# EAGLE board midi_nubbin_panel (EAGLE 6.6.0)
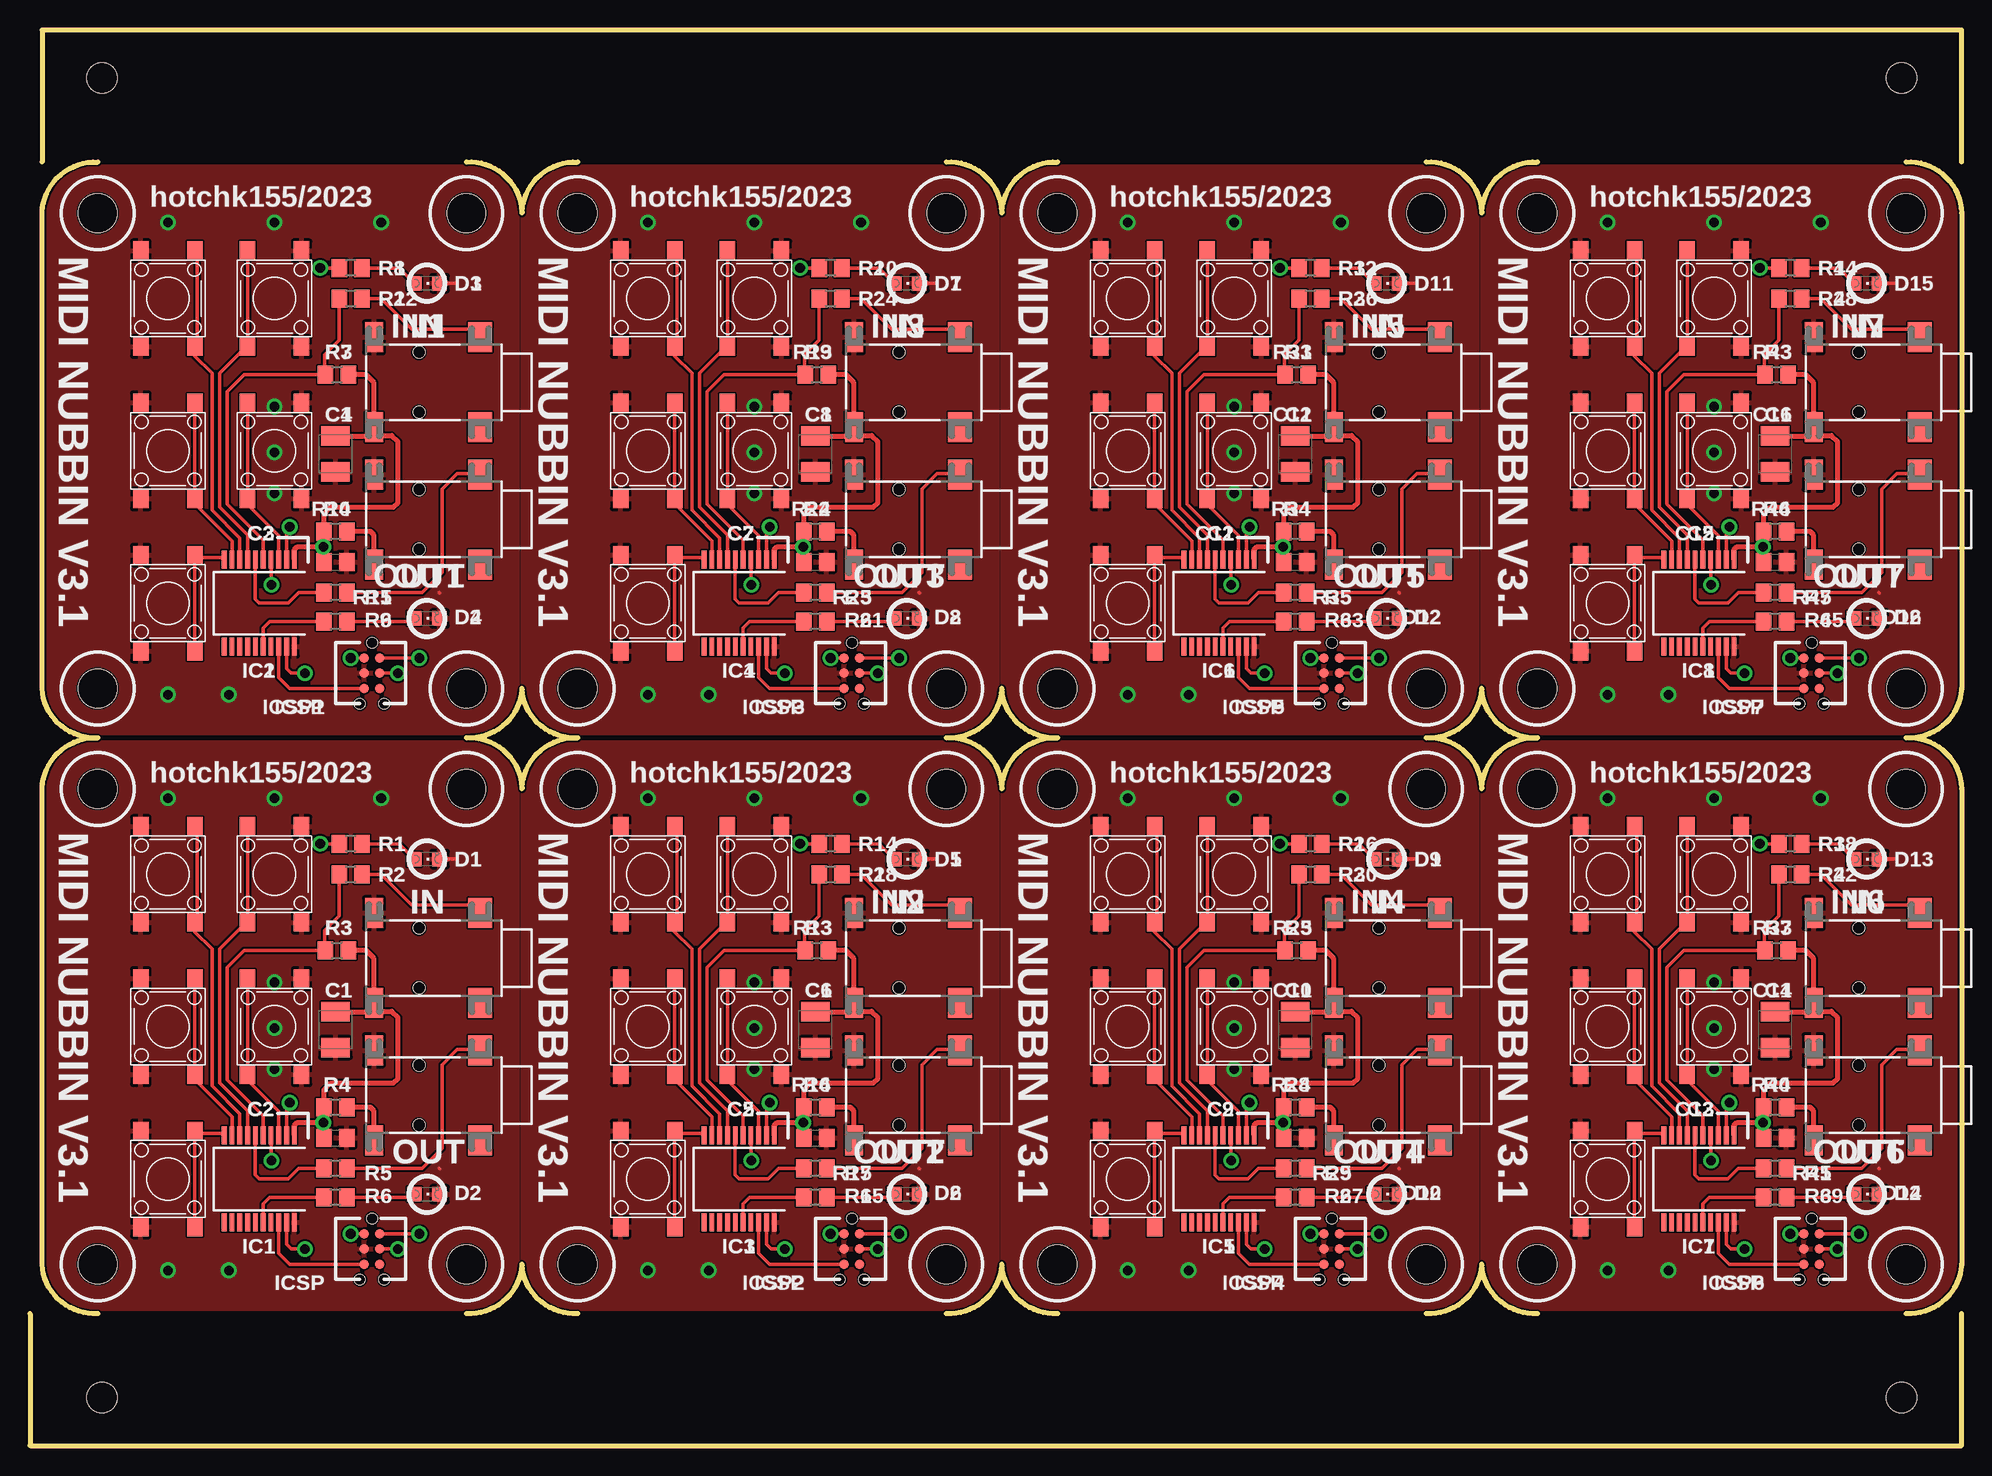
[diagram p0: board, top side]
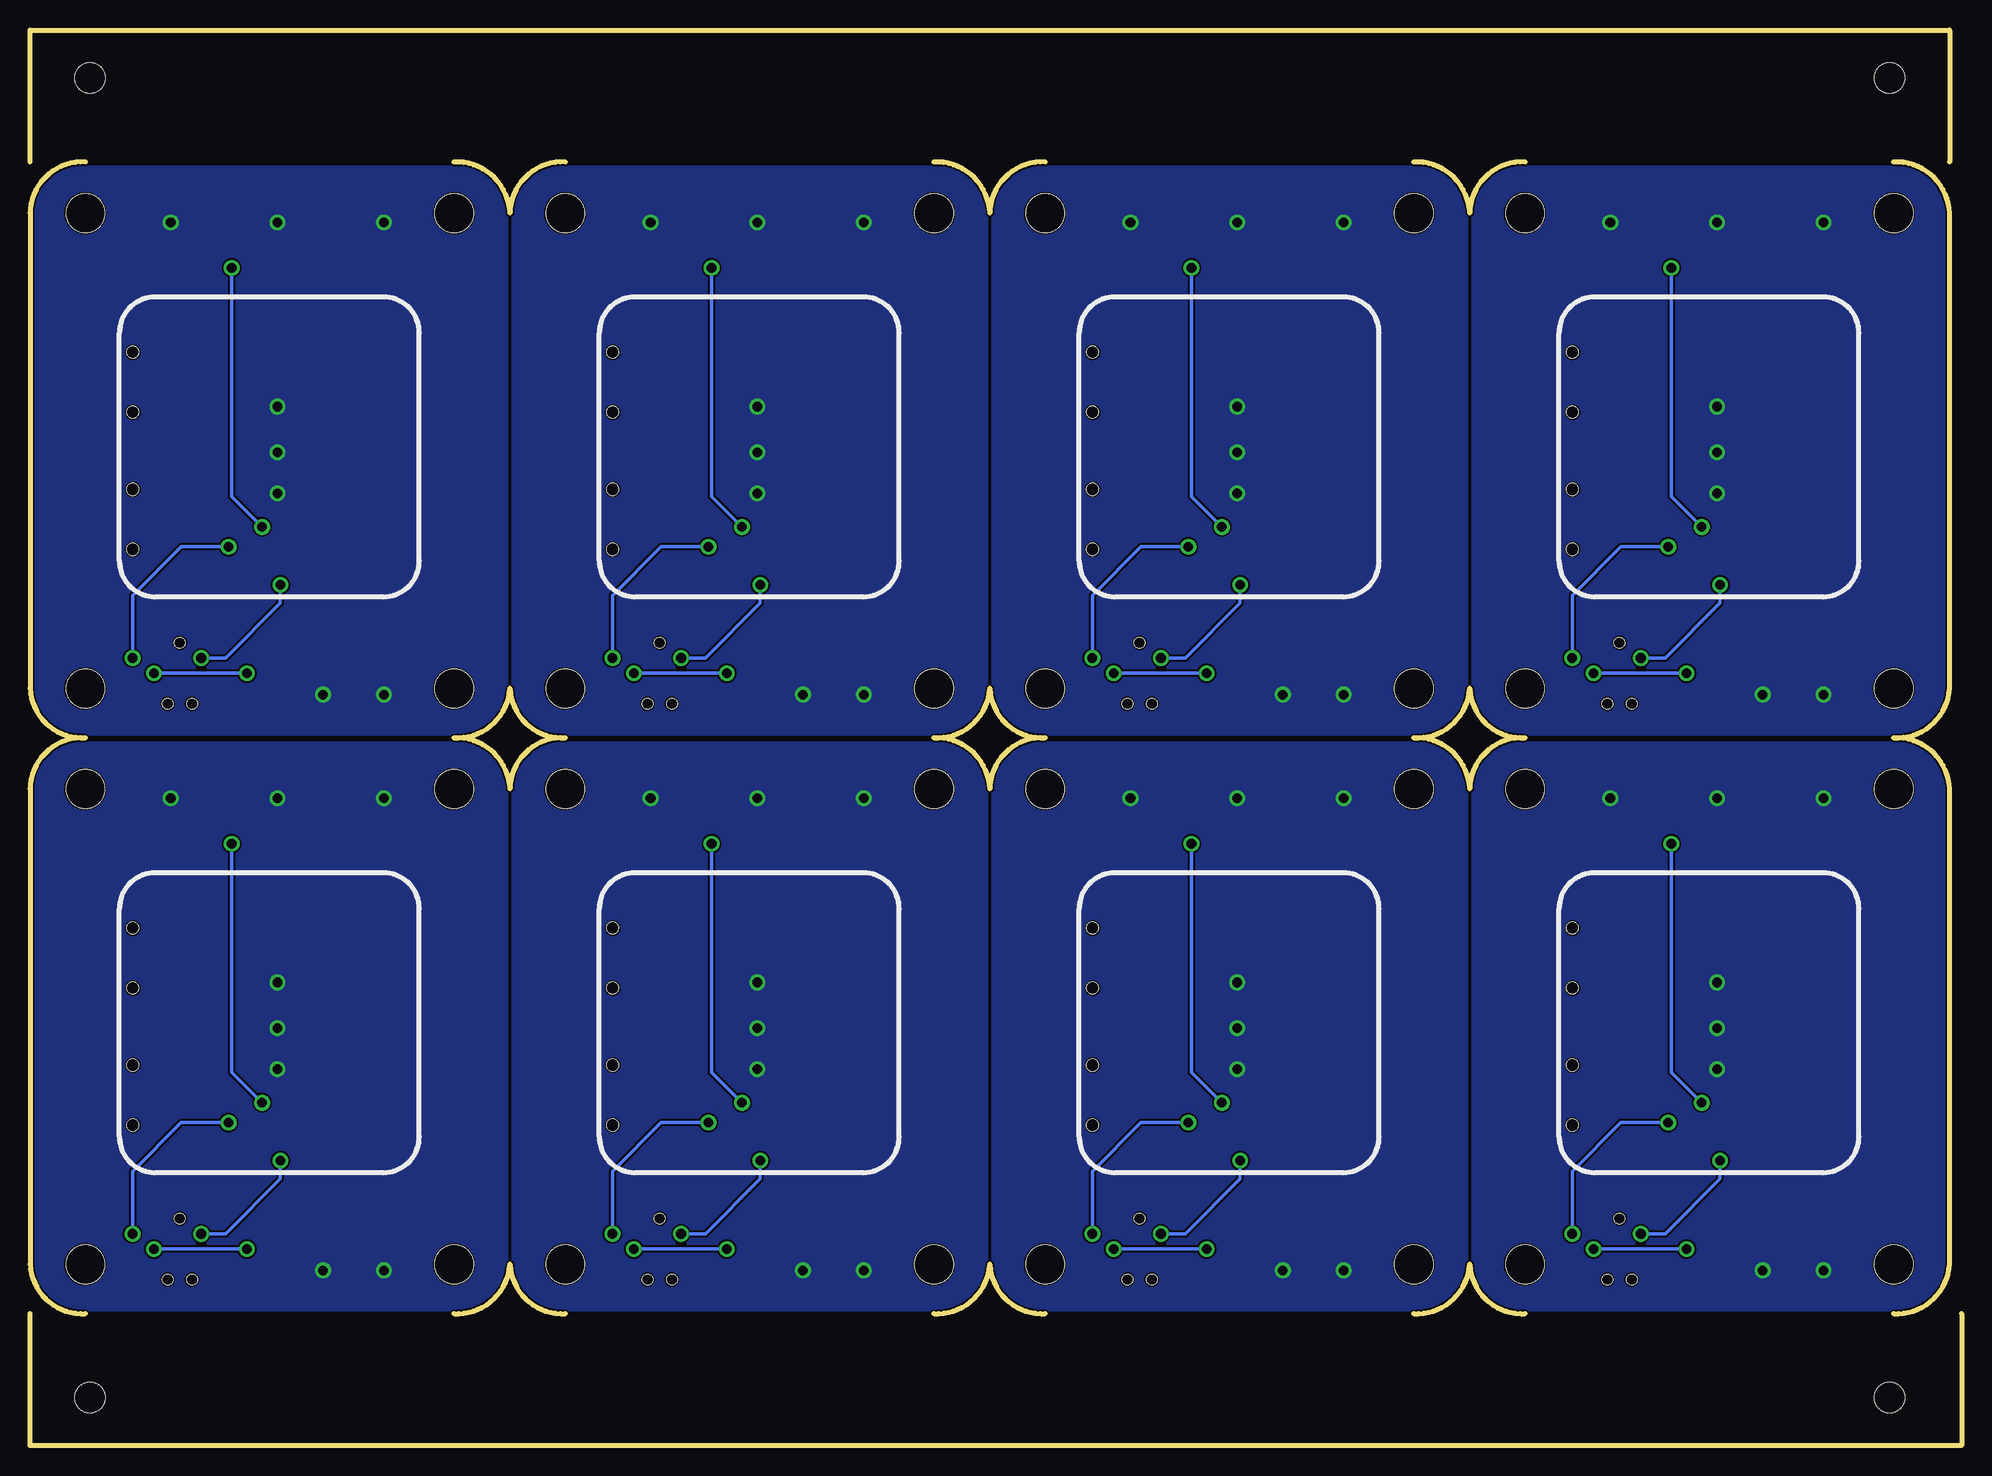
[diagram p1: board, bottom side, seen from below]

Size 161 x 118 mm. Coordinates in mm from the lower left corner, seen from the top.
Outline: 36.38,11 arc90 41,15.11 arc90 45.65,11
Outline: 5.65,11 arc-90 1,15.11 1,54.73 arc-90 5.65,59 arc-90 1,63.11 1,102.73 arc-90 5.65,107
Outline: 36.38,107 arc-92 41,102.73 arc-90 45.65,107
Outline: 76.38,11 arc90 81,15.11 arc90 85.65,11
Outline: 76.38,107 arc-92 81,102.73 arc-90 85.65,107
Outline: 116.38,11 arc90 121,15.11 arc90 125.65,11
Outline: 116.38,107 arc-92 121,102.73 arc-90 125.65,107
Outline: 156.38,11 arc90 161,15.11 161,54.73 arc92 156.38,59 arc90 161,63.11 161,102.73 arc92 156.38,107
Outline: 161,107 161,118 1,118 1,107
Outline: 0,11 0,0 161,0 161,11
Outline: 36.38,59 arc-92 41,54.73 arc-90 45.65,59 arc-90 41,63.11 arc-90 36.38,59
Outline: 76.38,59 arc-92 81,54.73 arc-90 85.65,59 arc-90 81,63.11 arc-90 76.38,59
Outline: 116.38,59 arc-92 121,54.73 arc-90 125.65,59 arc-90 121,63.11 arc-90 116.38,59
Copper layers (1*16): Top 0.035mm / dielectric 1.5mm / Bottom 0.035mm
Design rules "hackvana *": minimum track width 6mil, minimum drill 0.3mm, track to track 6mil, track to pad 9mil, pad to pad 6mil, via to via 6mil, smd to smd 0mil, copper to edge 6mil, drill to drill 6mil, minimum pad ring 10mil, minimum via ring 10mil, stop-mask expansion 2mil, vias tented up to drill 100mil, thermal gap 10mil
Holes 3.2 mm at 5.65,54.73 5.65,15.11 36.38,54.73 36.38,15.11 5.65,102.73 5.65,63.11 36.38,102.73 36.38,63.11 45.65,54.73 45.65,15.11 76.38,54.73 76.38,15.11 45.65,102.73 45.65,63.11 76.38,102.73 76.38,63.11 85.65,54.73 85.65,15.11 116.38,54.73 116.38,15.11 85.65,102.73 85.65,63.11 116.38,102.73 116.38,63.11 125.65,54.73 125.65,15.11 156.38,54.73 156.38,15.11 125.65,102.73 125.65,63.11 156.38,102.73 156.38,63.11
Holes 2.54 mm at 6,114 6,4 156,114 156,4

## Footprints (pad centres in the part's own frame; a part is rotated, then mirrored left to right if it is on the bottom)
SMC_B = smd 1.6 x 2.4: + -1.5,0; - 1.5,0
C0805 = smd 1.3 x 1.5: 1 -0.95,0; 2 0.95,0
CHIPLED_0805 = smd 1.2 x 1.2: A 0,-1.05; C 0,1.05
SSOP20 = smd 0.4 x 1.5: 1 -2.925,-3.625; 2 -2.275,-3.625; 3 -1.625,-3.625; 4 -0.975,-3.625; 5 -0.325,-3.625; 6 0.325,-3.625; 7 0.975,-3.625; 8 1.625,-3.625; 9 2.275,-3.625; 10 2.925,-3.625; 11 2.925,3.625; 12 2.275,3.625; 13 1.625,3.625; 14 0.975,3.625; 15 0.325,3.625; 16 -0.325,3.625; 17 -0.975,3.625; 18 -1.625,3.625; 19 -2.275,3.625; 20 -2.925,3.625
TC2030-MCP-NL = smd 0.787 x 0.787: 1 1.27,-0.635; 2 1.27,0.635; 3 2.54,-0.635; 4 2.54,0.635; 5 3.81,-0.635; 6 3.81,0.635 | hole 0.889: 0,0; 5.08,-1.016; 5.08,1.016
1503_02 = smd 2.5 x 1.5: 1 -3.75,-10.75; 3 3.75,-10.75 | smd 2.5 x 2: 2 -3.75,-1.9; 2@2 3.75,-1.9 | hole 1: -2.5,-7; 2.5,-7
R0805 = smd 1.3 x 1.5: 1 -0.95,0; 2 0.95,0
6MMTACTSMT = smd 1.55 x 1.3: 1 -4,2.25; 2 -4,-2.25; 3 4,-2.25; 4 4,2.25

## Placement (x,y rotation side)
C1  [SMC_B]  25.46,34.67 270 top
C2  [C0805]  25.46,25.65 0 top
C3  [C0805]  25.46,73.65 0 top
C4  [SMC_B]  25.46,82.67 270 top
C5  [C0805]  65.46,25.65 0 top
C6  [SMC_B]  65.46,34.67 270 top
C7  [C0805]  65.46,73.65 0 top
C8  [SMC_B]  65.46,82.67 270 top
C9  [C0805]  105.46,25.65 0 top
C10  [SMC_B]  105.46,34.67 270 top
C11  [C0805]  105.46,73.65 0 top
C12  [SMC_B]  105.46,82.67 270 top
C13  [C0805]  145.46,25.65 0 top
C14  [SMC_B]  145.46,34.67 270 top
C15  [C0805]  145.46,73.65 0 top
C16  [SMC_B]  145.46,82.67 270 top
D1  [CHIPLED_0805]  33.08,48.89 270 top
D2  [CHIPLED_0805]  33.08,20.95 270 top
D3  [CHIPLED_0805]  33.08,96.89 270 top
D4  [CHIPLED_0805]  33.08,68.95 270 top
D5  [CHIPLED_0805]  73.08,48.89 270 top
D6  [CHIPLED_0805]  73.08,20.95 270 top
D7  [CHIPLED_0805]  73.08,96.89 270 top
D8  [CHIPLED_0805]  73.08,68.95 270 top
D9  [CHIPLED_0805]  113.08,48.89 270 top
D10  [CHIPLED_0805]  113.08,20.95 270 top
D11  [CHIPLED_0805]  113.08,96.89 270 top
D12  [CHIPLED_0805]  113.08,68.95 270 top
D13  [CHIPLED_0805]  153.08,48.89 270 top
D14  [CHIPLED_0805]  153.08,20.95 270 top
D15  [CHIPLED_0805]  153.08,96.89 270 top
D16  [CHIPLED_0805]  153.08,68.95 270 top
IC1  PIC16F15345SSOP20  [SSOP20]  19.11,22.22 180 top
IC2  PIC16F15345SSOP20  [SSOP20]  19.11,70.22 180 top
IC3  PIC16F15345SSOP20  [SSOP20]  59.11,22.22 180 top
IC4  PIC16F15345SSOP20  [SSOP20]  59.11,70.22 180 top
IC5  PIC16F15345SSOP20  [SSOP20]  99.11,22.22 180 top
IC6  PIC16F15345SSOP20  [SSOP20]  99.11,70.22 180 top
IC7  PIC16F15345SSOP20  [SSOP20]  139.11,22.22 180 top
IC8  PIC16F15345SSOP20  [SSOP20]  139.11,70.22 180 top
ICSP  [TC2030-MCP-NL]  28.51,18.92 270 top
ICSP1  [TC2030-MCP-NL]  28.51,66.92 270 top
ICSP2  [TC2030-MCP-NL]  68.51,18.92 270 top
ICSP3  [TC2030-MCP-NL]  68.51,66.92 270 top
ICSP4  [TC2030-MCP-NL]  108.51,18.92 270 top
ICSP5  [TC2030-MCP-NL]  108.51,66.92 270 top
ICSP6  [TC2030-MCP-NL]  148.51,18.92 270 top
ICSP7  [TC2030-MCP-NL]  148.51,66.92 270 top
IN  1503_02  [1503_02]  39.43,40.64 270 top
IN1  1503_02  [1503_02]  39.43,88.64 270 top
IN2  1503_02  [1503_02]  79.43,40.64 270 top
IN3  1503_02  [1503_02]  79.43,88.64 270 top
IN4  1503_02  [1503_02]  119.43,40.64 270 top
IN5  1503_02  [1503_02]  119.43,88.64 270 top
IN6  1503_02  [1503_02]  159.43,40.64 270 top
IN7  1503_02  [1503_02]  159.43,88.64 270 top
OUT  1503_02  [1503_02]  39.43,29.2 270 top
OUT1  1503_02  [1503_02]  39.43,77.2 270 top
OUT2  1503_02  [1503_02]  79.43,29.2 270 top
OUT3  1503_02  [1503_02]  79.43,77.2 270 top
OUT4  1503_02  [1503_02]  119.43,29.2 270 top
OUT5  1503_02  [1503_02]  119.43,77.2 270 top
OUT6  1503_02  [1503_02]  159.43,29.2 270 top
OUT7  1503_02  [1503_02]  159.43,77.2 270 top
R1  [R0805]  26.73,50.16 180 top
R2  220  [R0805]  26.73,47.62 0 top
R3  4k7  [R0805]  25.59,41.27 0 top
R4  [R0805]  25.46,28.19 180 top
R5  220  [R0805]  25.46,23.11 180 top
R6  [R0805]  25.46,20.7 180 top
R7  4k7  [R0805]  25.59,89.27 0 top
R8  [R0805]  26.73,98.16 180 top
R9  [R0805]  25.46,68.7 180 top
R10  [R0805]  25.46,76.19 180 top
R11  220  [R0805]  25.46,71.11 180 top
R12  220  [R0805]  26.73,95.62 0 top
R13  4k7  [R0805]  65.59,41.27 0 top
R14  [R0805]  66.73,50.16 180 top
R15  [R0805]  65.46,20.7 180 top
R16  [R0805]  65.46,28.19 180 top
R17  220  [R0805]  65.46,23.11 180 top
R18  220  [R0805]  66.73,47.62 0 top
R19  4k7  [R0805]  65.59,89.27 0 top
R20  [R0805]  66.73,98.16 180 top
R21  [R0805]  65.46,68.7 180 top
R22  [R0805]  65.46,76.19 180 top
R23  220  [R0805]  65.46,71.11 180 top
R24  220  [R0805]  66.73,95.62 0 top
R25  4k7  [R0805]  105.59,41.27 0 top
R26  [R0805]  106.73,50.16 180 top
R27  [R0805]  105.46,20.7 180 top
R28  [R0805]  105.46,28.19 180 top
R29  220  [R0805]  105.46,23.11 180 top
R30  220  [R0805]  106.73,47.62 0 top
R31  4k7  [R0805]  105.59,89.27 0 top
R32  [R0805]  106.73,98.16 180 top
R33  [R0805]  105.46,68.7 180 top
R34  [R0805]  105.46,76.19 180 top
R35  220  [R0805]  105.46,71.11 180 top
R36  220  [R0805]  106.73,95.62 0 top
R37  4k7  [R0805]  145.59,41.27 0 top
R38  [R0805]  146.73,50.16 180 top
R39  [R0805]  145.46,20.7 180 top
R40  [R0805]  145.46,28.19 180 top
R41  220  [R0805]  145.46,23.11 180 top
R42  220  [R0805]  146.73,47.62 0 top
R43  4k7  [R0805]  145.59,89.27 0 top
R44  [R0805]  146.73,98.16 180 top
R45  [R0805]  145.46,68.7 180 top
R46  [R0805]  145.46,76.19 180 top
R47  220  [R0805]  145.46,71.11 180 top
R48  220  [R0805]  146.73,95.62 0 top
SW1  6MMTACTSMT  [6MMTACTSMT]  20.38,47.62 90 top
SW2  6MMTACTSMT  [6MMTACTSMT]  20.38,34.92 90 top
SW3  6MMTACTSMT  [6MMTACTSMT]  11.49,47.62 270 top
SW4  6MMTACTSMT  [6MMTACTSMT]  11.49,70.22 270 top
SW5  6MMTACTSMT  [6MMTACTSMT]  11.49,22.22 270 top
SW6  6MMTACTSMT  [6MMTACTSMT]  11.49,82.92 270 top
SW7  6MMTACTSMT  [6MMTACTSMT]  11.49,95.62 270 top
SW8  6MMTACTSMT  [6MMTACTSMT]  20.38,95.62 90 top
SW9  6MMTACTSMT  [6MMTACTSMT]  20.38,82.92 90 top
SW10  6MMTACTSMT  [6MMTACTSMT]  51.49,22.22 270 top
SW11  6MMTACTSMT  [6MMTACTSMT]  51.49,34.92 270 top
SW12  6MMTACTSMT  [6MMTACTSMT]  51.49,47.62 270 top
SW13  6MMTACTSMT  [6MMTACTSMT]  60.38,47.62 90 top
SW14  6MMTACTSMT  [6MMTACTSMT]  60.38,34.92 90 top
SW15  6MMTACTSMT  [6MMTACTSMT]  51.49,70.22 270 top
SW16  6MMTACTSMT  [6MMTACTSMT]  51.49,82.92 270 top
SW17  6MMTACTSMT  [6MMTACTSMT]  51.49,95.62 270 top
SW18  6MMTACTSMT  [6MMTACTSMT]  60.38,95.62 90 top
SW19  6MMTACTSMT  [6MMTACTSMT]  60.38,82.92 90 top
SW20  6MMTACTSMT  [6MMTACTSMT]  91.49,22.22 270 top
SW21  6MMTACTSMT  [6MMTACTSMT]  91.49,34.92 270 top
SW22  6MMTACTSMT  [6MMTACTSMT]  91.49,47.62 270 top
SW23  6MMTACTSMT  [6MMTACTSMT]  100.38,47.62 90 top
SW24  6MMTACTSMT  [6MMTACTSMT]  100.38,34.92 90 top
SW25  6MMTACTSMT  [6MMTACTSMT]  91.49,70.22 270 top
SW26  6MMTACTSMT  [6MMTACTSMT]  91.49,82.92 270 top
SW27  6MMTACTSMT  [6MMTACTSMT]  91.49,95.62 270 top
SW28  6MMTACTSMT  [6MMTACTSMT]  100.38,95.62 90 top
SW29  6MMTACTSMT  [6MMTACTSMT]  100.38,82.92 90 top
SW30  6MMTACTSMT  [6MMTACTSMT]  131.49,22.22 270 top
SW31  6MMTACTSMT  [6MMTACTSMT]  131.49,34.92 270 top
SW32  6MMTACTSMT  [6MMTACTSMT]  131.49,47.62 270 top
SW33  6MMTACTSMT  [6MMTACTSMT]  140.38,47.62 90 top
SW34  6MMTACTSMT  [6MMTACTSMT]  140.38,34.92 90 top
SW35  6MMTACTSMT  [6MMTACTSMT]  131.49,70.22 270 top
SW36  6MMTACTSMT  [6MMTACTSMT]  131.49,82.92 270 top
SW37  6MMTACTSMT  [6MMTACTSMT]  131.49,95.62 270 top
SW38  6MMTACTSMT  [6MMTACTSMT]  140.38,95.62 90 top
SW39  6MMTACTSMT  [6MMTACTSMT]  140.38,82.92 90 top
SW45  6MMTACTSMT  [6MMTACTSMT]  11.49,34.92 270 top

## Library data of the parts
C1 C4 C6 C8 C10 C12 C14 C16 = resistor
C2 C3 C5 C7 C9 C11 C13 C15 R1-R48 = rcl
D1-D16 = adafruit
IC1-IC8 SW1-SW39 SW45 = jason_eagle6
ICSP ICSP1-ICSP7 = tag-connect
IN IN1-IN7 OUT OUT1-OUT7 = con-lumberg; OC_FARNELL: 1216979; OC_NEWARK: unknown

## Nets
+5V: C1.+ C2.1 IC1.1 ICSP.2 IN.3 R3.2 R4.2
+5V1: C3.1 C4.+ IC2.1 ICSP1.2 IN1.3 R7.2 R10.2
+5V2: C5.1 C6.+ IC3.1 ICSP2.2 IN2.3 R13.2 R16.2
+5V3: C7.1 C8.+ IC4.1 ICSP3.2 IN3.3 R19.2 R22.2
+5V4: C9.1 C10.+ IC5.1 ICSP4.2 IN4.3 R25.2 R28.2
+5V5: C11.1 C12.+ IC6.1 ICSP5.2 IN5.3 R31.2 R34.2
+5V6: C13.1 C14.+ IC7.1 ICSP6.2 IN6.3 R37.2 R40.2
+5V7: C15.1 C16.+ IC8.1 ICSP7.2 IN7.3 R43.2 R46.2
GND: C1.- C2.2 D1.C D2.C IC1.20 ICSP.3 IN.1 OUT.1 SW1.2 SW1.3 SW2.2 SW2.3 SW3.2 SW3.3 SW5.2 SW5.3 SW45.2 SW45.3
GND1: C3.2 C4.- D3.C D4.C IC2.20 ICSP1.3 IN1.1 OUT1.1 SW4.2 SW4.3 SW6.2 SW6.3 SW7.2 SW7.3 SW8.2 SW8.3 SW9.2 SW9.3
GND2: C5.2 C6.- D5.C D6.C IC3.20 ICSP2.3 IN2.1 OUT2.1 SW10.2 SW10.3 SW11.2 SW11.3 SW12.2 SW12.3 SW13.2 SW13.3 SW14.2 SW14.3
GND3: C7.2 C8.- D7.C D8.C IC4.20 ICSP3.3 IN3.1 OUT3.1 SW15.2 SW15.3 SW16.2 SW16.3 SW17.2 SW17.3 SW18.2 SW18.3 SW19.2 SW19.3
GND4: C9.2 C10.- D9.C D10.C IC5.20 ICSP4.3 IN4.1 OUT4.1 SW20.2 SW20.3 SW21.2 SW21.3 SW22.2 SW22.3 SW23.2 SW23.3 SW24.2 SW24.3
GND5: C11.2 C12.- D11.C D12.C IC6.20 ICSP5.3 IN5.1 OUT5.1 SW25.2 SW25.3 SW26.2 SW26.3 SW27.2 SW27.3 SW28.2 SW28.3 SW29.2 SW29.3
GND6: C13.2 C14.- D13.C D14.C IC7.20 ICSP6.3 IN6.1 OUT6.1 SW30.2 SW30.3 SW31.2 SW31.3 SW32.2 SW32.3 SW33.2 SW33.3 SW34.2 SW34.3
GND7: C15.2 C16.- D15.C D16.C IC8.20 ICSP7.3 IN7.1 OUT7.1 SW35.2 SW35.3 SW36.2 SW36.3 SW37.2 SW37.3 SW38.2 SW38.3 SW39.2 SW39.3
KEY1: IC1.3 SW2.1 SW2.4
KEY2: IC1.7 SW1.1 SW1.4
KEY3: IC1.8 SW3.1 SW3.4
KEY4: IC1.9 SW45.1 SW45.4
KEY5: IC1.10 SW5.1 SW5.4
KEY6: IC2.8 SW7.1 SW7.4
KEY7: IC2.3 SW9.1 SW9.4
KEY8: IC2.7 SW8.1 SW8.4
KEY9: IC2.9 SW6.1 SW6.4
KEY10: IC2.10 SW4.1 SW4.4
KEY11: IC3.8 SW12.1 SW12.4
KEY12: IC3.3 SW14.1 SW14.4
KEY13: IC3.7 SW13.1 SW13.4
KEY14: IC3.9 SW11.1 SW11.4
KEY15: IC3.10 SW10.1 SW10.4
KEY16: IC4.8 SW17.1 SW17.4
KEY17: IC4.3 SW19.1 SW19.4
KEY18: IC4.7 SW18.1 SW18.4
KEY19: IC4.9 SW16.1 SW16.4
KEY20: IC4.10 SW15.1 SW15.4
KEY21: IC5.8 SW22.1 SW22.4
KEY22: IC5.3 SW24.1 SW24.4
KEY23: IC5.7 SW23.1 SW23.4
KEY24: IC5.9 SW21.1 SW21.4
KEY25: IC5.10 SW20.1 SW20.4
KEY26: IC6.8 SW27.1 SW27.4
KEY27: IC6.3 SW29.1 SW29.4
KEY28: IC6.7 SW28.1 SW28.4
KEY29: IC6.9 SW26.1 SW26.4
KEY30: IC6.10 SW25.1 SW25.4
KEY31: IC7.8 SW32.1 SW32.4
KEY32: IC7.3 SW34.1 SW34.4
KEY33: IC7.7 SW33.1 SW33.4
KEY34: IC7.9 SW31.1 SW31.4
KEY35: IC7.10 SW30.1 SW30.4
KEY36: IC8.8 SW37.1 SW37.4
KEY37: IC8.3 SW39.1 SW39.4
KEY38: IC8.7 SW38.1 SW38.4
KEY39: IC8.9 SW36.1 SW36.4
KEY40: IC8.10 SW35.1 SW35.4
LED1: IC1.2 R1.2
LED2: IC1.16 R6.2
LED3: IC2.2 R8.2
LED4: IC2.16 R9.2
LED5: IC3.2 R14.2
LED6: IC3.16 R15.2
LED7: IC4.2 R20.2
LED8: IC4.16 R21.2
LED9: IC5.2 R26.2
LED10: IC5.16 R27.2
LED11: IC6.2 R32.2
LED12: IC6.16 R33.2
LED13: IC7.2 R38.2
LED14: IC7.16 R39.2
LED15: IC8.2 R44.2
LED16: IC8.16 R45.2
N$1: D1.A R1.1
N$2: D2.A R6.1
N$3: OUT.3 R4.1
N$4: OUT.2 R5.1
N$5: IN.2 R2.2
N$6: D3.A R8.1
N$7: D4.A R9.1
N$8: OUT1.3 R10.1
N$9: OUT1.2 R11.1
N$10: IN1.2 R12.2
N$11: D5.A R14.1
N$12: D6.A R15.1
N$13: OUT2.3 R16.1
N$14: OUT2.2 R17.1
N$15: IN2.2 R18.2
N$16: D7.A R20.1
N$17: D8.A R21.1
N$18: OUT3.3 R22.1
N$19: OUT3.2 R23.1
N$20: IN3.2 R24.2
N$21: D9.A R26.1
N$22: D10.A R27.1
N$23: OUT4.3 R28.1
N$24: OUT4.2 R29.1
N$25: IN4.2 R30.2
N$26: D11.A R32.1
N$27: D12.A R33.1
N$28: OUT5.3 R34.1
N$29: OUT5.2 R35.1
N$30: IN5.2 R36.2
N$31: D13.A R38.1
N$32: D14.A R39.1
N$33: OUT6.3 R40.1
N$34: OUT6.2 R41.1
N$35: IN6.2 R42.2
N$36: D15.A R44.1
N$37: D16.A R45.1
N$38: OUT7.3 R46.1
N$39: OUT7.2 R47.1
N$40: IN7.2 R48.2
PGC: IC1.18 ICSP.5
PGC1: IC2.18 ICSP1.5
PGC2: IC3.18 ICSP2.5
PGC3: IC4.18 ICSP3.5
PGC4: IC5.18 ICSP4.5
PGC5: IC6.18 ICSP5.5
PGC6: IC7.18 ICSP6.5
PGC7: IC8.18 ICSP7.5
PGD: IC1.19 ICSP.4
PGD1: IC2.19 ICSP1.4
PGD2: IC3.19 ICSP2.4
PGD3: IC4.19 ICSP3.4
PGD4: IC5.19 ICSP4.4
PGD5: IC6.19 ICSP5.4
PGD6: IC7.19 ICSP6.4
PGD7: IC8.19 ICSP7.4
RX: IC1.5 R2.1 R3.1
RX1: IC2.5 R7.1 R12.1
RX2: IC3.5 R13.1 R18.1
RX3: IC4.5 R19.1 R24.1
RX4: IC5.5 R25.1 R30.1
RX5: IC6.5 R31.1 R36.1
RX6: IC7.5 R37.1 R42.1
RX7: IC8.5 R43.1 R48.1
TX: IC1.6 R5.2
TX1: IC2.6 R11.2
TX2: IC3.6 R17.2
TX3: IC4.6 R23.2
TX4: IC5.6 R29.2
TX5: IC6.6 R35.2
TX6: IC7.6 R41.2
TX7: IC8.6 R47.2
VPP: IC1.4 ICSP.1
VPP1: IC2.4 ICSP1.1
VPP2: IC3.4 ICSP2.1
VPP3: IC4.4 ICSP3.1
VPP4: IC5.4 ICSP4.1
VPP5: IC6.4 ICSP5.1
VPP6: IC7.4 ICSP6.1
VPP7: IC8.4 ICSP7.1

## Tracks (layer width: path | path; a pad name or v marks a point on that pad's centre or on a via)
+5V  (via drill 0.8)
  Top 0.305: 22.04,25.65 IC1.1 | ICSP.2 v32.45,17.65
  Top 0.406: R3.2 28,41.27 28.68,40.59 IN.3 28.25,36.45 | C1.+ 27.96,36.17 28.25,36.45 | 28.25,36.45 28.5,36.45 28.76,36.19 30.16,36.19 30.67,35.68 30.67,30.6 30.29,30.22 25.08,30.22 24.51,29.65 R4.2 24.44,28.12 v24.44,26.92 | IC1.1 22.04,26.67 22.29,26.92 v24.44,26.92 | v24.44,26.92 24.44,25.71 C2.1
  Bottom 0.305: v32.45,17.65 32.45,22.86 28.38,26.92 v24.44,26.92
+5V1  (via drill 0.8)
  Top 0.305: 22.04,73.65 IC2.1 | ICSP1.2 v32.45,65.65
  Top 0.406: R7.2 28,89.27 28.68,88.59 IN1.3 28.25,84.45 | C4.+ 27.96,84.17 28.25,84.45 | 28.25,84.45 28.5,84.45 28.76,84.19 30.16,84.19 30.67,83.68 30.67,78.6 30.29,78.22 25.08,78.22 24.51,77.65 R10.2 24.44,76.12 v24.44,74.92 | IC2.1 22.04,74.67 22.29,74.92 v24.44,74.92 | v24.44,74.92 24.44,73.72 C3.1
  Bottom 0.305: v32.45,65.65 32.45,70.85 28.38,74.92 v24.44,74.92
+5V2  (via drill 0.8)
  Top 0.305: 62.03,25.65 IC3.1 | ICSP2.2 v72.44,17.65
  Top 0.406: R13.2 68,41.27 68.68,40.59 IN2.3 68.25,36.45 | C6.+ 67.96,36.17 68.25,36.45 | 68.25,36.45 68.5,36.45 68.76,36.19 70.16,36.19 70.67,35.68 70.67,30.6 70.29,30.22 65.08,30.22 64.51,29.65 R16.2 64.44,28.12 v64.44,26.92 | IC3.1 62.03,26.67 62.28,26.92 v64.44,26.92 | v64.44,26.92 64.44,25.71 C5.1
  Bottom 0.305: v72.44,17.65 72.44,22.86 68.38,26.92 v64.44,26.92
+5V3  (via drill 0.8)
  Top 0.305: 62.03,73.65 IC4.1 | ICSP3.2 v72.44,65.65
  Top 0.406: R19.2 68,89.27 68.68,88.59 IN3.3 68.25,84.45 | C8.+ 67.96,84.17 68.25,84.45 | 68.25,84.45 68.5,84.45 68.76,84.19 70.16,84.19 70.67,83.68 70.67,78.6 70.29,78.22 65.08,78.22 64.51,77.65 R22.2 64.44,76.12 v64.44,74.92 | IC4.1 62.03,74.67 62.28,74.92 v64.44,74.92 | v64.44,74.92 64.44,73.72 C7.1
  Bottom 0.305: v72.44,65.65 72.44,70.85 68.38,74.92 v64.44,74.92
+5V4  (via drill 0.8)
  Top 0.305: 102.03,25.65 IC5.1 | ICSP4.2 v112.44,17.65
  Top 0.406: R25.2 108,41.27 108.68,40.59 IN4.3 108.25,36.45 | C10.+ 107.96,36.17 108.25,36.45 | 108.25,36.45 108.5,36.45 108.76,36.19 110.16,36.19 110.67,35.68 110.67,30.6 110.29,30.22 105.08,30.22 104.51,29.65 R28.2 104.44,28.12 v104.44,26.92 | IC5.1 102.03,26.67 102.28,26.92 v104.44,26.92 | v104.44,26.92 104.44,25.71 C9.1
  Bottom 0.305: v112.44,17.65 112.44,22.86 108.38,26.92 v104.44,26.92
+5V5  (via drill 0.8)
  Top 0.305: 102.03,73.65 IC6.1 | ICSP5.2 v112.44,65.65
  Top 0.406: R31.2 108,89.27 108.68,88.59 IN5.3 108.25,84.45 | C12.+ 107.96,84.17 108.25,84.45 | 108.25,84.45 108.5,84.45 108.76,84.19 110.16,84.19 110.67,83.68 110.67,78.6 110.29,78.22 105.08,78.22 104.51,77.65 R34.2 104.44,76.12 v104.44,74.92 | IC6.1 102.03,74.67 102.28,74.92 v104.44,74.92 | v104.44,74.92 104.44,73.72 C11.1
  Bottom 0.305: v112.44,65.65 112.44,70.85 108.38,74.92 v104.44,74.92
+5V6  (via drill 0.8)
  Top 0.305: 142.03,25.65 IC7.1 | ICSP6.2 v152.44,17.65
  Top 0.406: R37.2 148,41.27 148.68,40.59 IN6.3 148.25,36.45 | C14.+ 147.96,36.17 148.25,36.45 | 148.25,36.45 148.5,36.45 148.76,36.19 150.16,36.19 150.67,35.68 150.67,30.6 150.29,30.22 145.08,30.22 144.51,29.65 R40.2 144.44,28.12 v144.44,26.92 | IC7.1 142.03,26.67 142.28,26.92 v144.44,26.92 | v144.44,26.92 144.44,25.71 C13.1
  Bottom 0.305: v152.44,17.65 152.44,22.86 148.38,26.92 v144.44,26.92
+5V7  (via drill 0.8)
  Top 0.305: 142.03,73.65 IC8.1 | ICSP7.2 v152.44,65.65
  Top 0.406: R43.2 148,89.27 148.68,88.59 IN7.3 148.25,84.45 | C16.+ 147.96,84.17 148.25,84.45 | 148.25,84.45 148.5,84.45 148.76,84.19 150.16,84.19 150.67,83.68 150.67,78.6 150.29,78.22 145.08,78.22 144.51,77.65 R46.2 144.44,76.12 v144.44,74.92 | IC8.1 142.03,74.67 142.28,74.92 v144.44,74.92 | v144.44,74.92 144.44,73.72 C15.1
  Bottom 0.305: v152.44,65.65 152.44,70.85 148.38,74.92 v144.44,74.92
GND  (via drill 0.8)
  Top 0.305: D1.C 35.62,48.89 | 34.13,23.07 34.1,23.11
  other vias: 11.49,53.97 20.38,53.97 29.27,53.97 11.49,14.6 16.57,14.6 20.38,38.6 20.38,31.36 20.38,34.79
  pour Top: 1.1,58.6 40.6,58.6 40.6,11.4 1.1,11.4
  pour Bottom: 1.3,58.5 40.7,58.5 40.7,11.4 1.3,11.4
GND1  (via drill 0.8)
  Top 0.305: D3.C 35.62,96.89 | 34.13,71.08 34.1,71.11
  other vias: 11.49,101.97 20.38,101.97 29.27,101.97 11.49,62.6 16.57,62.6 20.38,86.6 20.38,79.36 20.38,82.79
  pour Top: 1.1,106.6 40.6,106.6 40.6,59.4 1.1,59.4
  pour Bottom: 1.3,106.5 40.7,106.5 40.7,59.4 1.3,59.4
GND2  (via drill 0.8)
  Top 0.305: D5.C 75.62,48.89 | 74.13,23.07 74.1,23.11
  other vias: 51.49,53.97 60.38,53.97 69.27,53.97 51.49,14.6 56.57,14.6 60.38,38.6 60.38,31.36 60.38,34.79
  pour Top: 41.1,58.6 80.6,58.6 80.6,11.4 41.1,11.4
  pour Bottom: 41.3,58.5 80.7,58.5 80.7,11.4 41.3,11.4
GND3  (via drill 0.8)
  Top 0.305: D7.C 75.62,96.89 | 74.13,71.08 74.1,71.11
  other vias: 51.49,101.97 60.38,101.97 69.27,101.97 51.49,62.6 56.57,62.6 60.38,86.6 60.38,79.36 60.38,82.79
  pour Top: 41.1,106.6 80.6,106.6 80.6,59.4 41.1,59.4
  pour Bottom: 41.3,106.5 80.7,106.5 80.7,59.4 41.3,59.4
GND4  (via drill 0.8)
  Top 0.305: D9.C 115.62,48.89 | 114.13,23.07 114.1,23.11
  other vias: 91.49,53.97 100.38,53.97 109.27,53.97 91.49,14.6 96.57,14.6 100.38,38.6 100.38,31.36 100.38,34.79
  pour Top: 81.1,58.6 120.6,58.6 120.6,11.4 81.1,11.4
  pour Bottom: 81.3,58.5 120.7,58.5 120.7,11.4 81.3,11.4
GND5  (via drill 0.8)
  Top 0.305: D11.C 115.62,96.89 | 114.13,71.08 114.1,71.11
  other vias: 91.49,101.97 100.38,101.97 109.27,101.97 91.49,62.6 96.57,62.6 100.38,86.6 100.38,79.36 100.38,82.79
  pour Top: 81.1,106.6 120.6,106.6 120.6,59.4 81.1,59.4
  pour Bottom: 81.3,106.5 120.7,106.5 120.7,59.4 81.3,59.4
GND6  (via drill 0.8)
  Top 0.305: D13.C 155.62,48.89 | 154.13,23.07 154.1,23.11
  other vias: 131.49,53.97 140.38,53.97 149.27,53.97 131.49,14.6 136.57,14.6 140.38,38.6 140.38,31.36 140.38,34.79
  pour Top: 121.1,58.6 160.6,58.6 160.6,11.4 121.1,11.4
  pour Bottom: 121.3,58.5 160.7,58.5 160.7,11.4 121.3,11.4
GND7  (via drill 0.8)
  Top 0.305: D15.C 155.62,96.89 | 154.13,71.08 154.1,71.11
  other vias: 131.49,101.97 140.38,101.97 149.27,101.97 131.49,62.6 136.57,62.6 140.38,86.6 140.38,79.36 140.38,82.79
  pour Top: 121.1,106.6 160.6,106.6 160.6,59.4 121.1,59.4
  pour Bottom: 121.3,106.5 160.7,106.5 160.7,59.4 121.3,59.4
KEY1
  Top 0.305: SW2.4 SW2.1 18.13,30.44 20.73,27.83 IC1.3
KEY2
  Top 0.305: IC1.7 18.14,27.89 15.81,30.22 15.81,41.4 17.46,43.05 17.56,43.05 SW1.1 | SW1.1 17.94,43.81 17.84,43.81 17.84,43.68 | SW1.4 SW1.1
KEY3
  Top 0.305: IC1.8 17.48,27.66 15.17,29.97 15.17,41.4 13.74,42.83 SW3.4 13.93,43.81 | 14.03,43.81 13.93,43.81 | SW3.1 13.93,51.43 13.93,43.81
KEY4
  Top 0.305: IC1.9 16.84,27.42 13.74,30.51 SW45.4 | SW45.4 13.84,30.92 14.03,31.11 | SW45.1 SW45.4
KEY5
  Top 0.305: IC1.10 16.19,25.78 15.94,26.03 13.93,26.03 SW5.1 SW5.4
KEY6
  Top 0.305: IC2.8 17.48,75.66 15.17,77.97 15.17,89.4 13.74,90.83 SW7.4 13.93,91.81 | 14.03,91.81 13.93,91.81 | SW7.1 13.93,99.43 13.93,91.81
KEY7
  Top 0.305: SW9.4 SW9.1 18.13,78.44 20.73,75.83 IC2.3
KEY8
  Top 0.305: IC2.7 18.14,75.89 15.81,78.22 15.81,89.4 17.46,91.05 17.56,91.05 SW8.1 | SW8.1 17.94,91.81 17.84,91.81 17.84,91.68 | SW8.4 SW8.1
KEY9
  Top 0.305: IC2.9 16.84,75.42 13.74,78.51 SW6.4 | SW6.4 13.84,78.92 14.03,79.11 | SW6.1 SW6.4
KEY10
  Top 0.305: IC2.10 16.19,73.78 15.94,74.03 13.93,74.03 SW4.1 SW4.4
KEY11
  Top 0.305: IC3.8 57.48,27.66 55.17,29.97 55.17,41.4 53.74,42.83 SW12.4 53.93,43.81 | 54.03,43.81 53.93,43.81 | SW12.1 53.93,51.43 53.93,43.81
KEY12
  Top 0.305: SW14.4 SW14.1 58.13,30.44 60.73,27.83 IC3.3
KEY13
  Top 0.305: IC3.7 58.13,27.89 55.81,30.22 55.81,41.4 57.46,43.05 57.56,43.05 SW13.1 | SW13.1 57.94,43.81 57.84,43.81 57.84,43.68 | SW13.4 SW13.1
KEY14
  Top 0.305: IC3.9 56.84,27.42 53.74,30.51 SW11.4 | SW11.4 53.84,30.92 54.03,31.11 | SW11.1 SW11.4
KEY15
  Top 0.305: IC3.10 56.19,25.78 55.94,26.03 53.93,26.03 SW10.1 SW10.4
KEY16
  Top 0.305: IC4.8 57.48,75.66 55.17,77.97 55.17,89.4 53.74,90.83 SW17.4 53.93,91.81 | 54.03,91.81 53.93,91.81 | SW17.1 53.93,99.43 53.93,91.81
KEY17
  Top 0.305: SW19.4 SW19.1 58.13,78.44 60.73,75.83 IC4.3
KEY18
  Top 0.305: IC4.7 58.13,75.89 55.81,78.22 55.81,89.4 57.46,91.05 57.56,91.05 SW18.1 | SW18.1 57.94,91.81 57.84,91.81 57.84,91.68 | SW18.4 SW18.1
KEY19
  Top 0.305: IC4.9 56.84,75.42 53.74,78.51 SW16.4 | SW16.4 53.84,78.92 54.03,79.11 | SW16.1 SW16.4
KEY20
  Top 0.305: IC4.10 56.19,73.78 55.94,74.03 53.93,74.03 SW15.1 SW15.4
KEY21
  Top 0.305: IC5.8 97.48,27.66 95.17,29.97 95.17,41.4 93.74,42.83 SW22.4 93.93,43.81 | 94.03,43.81 93.93,43.81 | SW22.1 93.93,51.43 93.93,43.81
KEY22
  Top 0.305: SW24.4 SW24.1 98.13,30.44 100.73,27.83 IC5.3
KEY23
  Top 0.305: IC5.7 98.14,27.89 95.81,30.22 95.81,41.4 97.46,43.05 97.56,43.05 SW23.1 | SW23.1 97.94,43.81 97.84,43.81 97.84,43.68 | SW23.4 SW23.1
KEY24
  Top 0.305: IC5.9 96.83,27.42 93.74,30.51 SW21.4 | SW21.4 93.84,30.92 94.03,31.11 | SW21.1 SW21.4
KEY25
  Top 0.305: IC5.10 96.19,25.78 95.94,26.03 93.93,26.03 SW20.1 SW20.4
KEY26
  Top 0.305: IC6.8 97.48,75.66 95.17,77.97 95.17,89.4 93.74,90.83 SW27.4 93.93,91.81 | 94.03,91.81 93.93,91.81 | SW27.1 93.93,99.43 93.93,91.81
KEY27
  Top 0.305: SW29.4 SW29.1 98.13,78.44 100.73,75.83 IC6.3
KEY28
  Top 0.305: IC6.7 98.14,75.89 95.81,78.22 95.81,89.4 97.46,91.05 97.56,91.05 SW28.1 | SW28.1 97.94,91.81 97.84,91.81 97.84,91.68 | SW28.4 SW28.1
KEY29
  Top 0.305: IC6.9 96.83,75.42 93.74,78.51 SW26.4 | SW26.4 93.84,78.92 94.03,79.11 | SW26.1 SW26.4
KEY30
  Top 0.305: IC6.10 96.19,73.78 95.94,74.03 93.93,74.03 SW25.1 SW25.4
KEY31
  Top 0.305: IC7.8 137.49,27.66 135.17,29.97 135.17,41.4 133.74,42.83 SW32.4 133.93,43.81 | 134.03,43.81 133.93,43.81 | SW32.1 133.93,51.43 133.93,43.81
KEY32
  Top 0.305: SW34.4 SW34.1 138.13,30.44 140.74,27.83 IC7.3
KEY33
  Top 0.305: IC7.7 138.13,27.89 135.81,30.22 135.81,41.4 137.46,43.05 137.56,43.05 SW33.1 | SW33.1 137.94,43.81 137.84,43.81 137.84,43.68 | SW33.4 SW33.1
KEY34
  Top 0.305: IC7.9 136.84,27.42 133.74,30.51 SW31.4 | SW31.4 133.84,30.92 134.03,31.11 | SW31.1 SW31.4
KEY35
  Top 0.305: IC7.10 136.19,25.78 135.94,26.03 133.93,26.03 SW30.1 SW30.4
KEY36
  Top 0.305: IC8.8 137.49,75.66 135.17,77.97 135.17,89.4 133.74,90.83 SW37.4 133.93,91.81 | 134.03,91.81 133.93,91.81 | SW37.1 133.93,99.43 133.93,91.81
KEY37
  Top 0.305: SW39.4 SW39.1 138.13,78.44 140.74,75.83 IC8.3
KEY38
  Top 0.305: IC8.7 138.13,75.89 135.81,78.22 135.81,89.4 137.46,91.05 137.56,91.05 SW38.1 | SW38.1 137.94,91.81 137.84,91.81 137.84,91.68 | SW38.4 SW38.1
KEY39
  Top 0.305: IC8.9 136.84,75.42 133.74,78.51 SW36.4 | SW36.4 133.84,78.92 134.03,79.11 | SW36.1 SW36.4
KEY40
  Top 0.305: IC8.10 136.19,73.78 135.94,74.03 133.93,74.03 SW35.1 SW35.4
LED1  (via drill 0.8)
  Top 0.305: IC1.2 21.39,28.3 v21.65,28.57 | v24.19,50.16 R1.2
  Bottom 0.305: v21.65,28.57 24.19,31.11 v24.19,50.16
LED2
  Top 0.305: IC1.16 19.43,20.13 20,20.7 R6.2
LED3  (via drill 0.8)
  Top 0.305: IC2.2 21.39,76.31 v21.65,76.57 | v24.19,98.16 R8.2
  Bottom 0.305: v21.65,76.57 24.19,79.11 v24.19,98.16
LED4
  Top 0.305: IC2.16 19.43,68.13 20,68.7 R9.2
LED5  (via drill 0.8)
  Top 0.305: IC3.2 61.38,28.3 v61.65,28.57 | v64.19,50.16 R14.2
  Bottom 0.305: v61.65,28.57 64.19,31.11 v64.19,50.16
LED6
  Top 0.305: IC3.16 59.44,20.13 60,20.7 R15.2
LED7  (via drill 0.8)
  Top 0.305: IC4.2 61.38,76.31 v61.65,76.57 | v64.19,98.16 R20.2
  Bottom 0.305: v61.65,76.57 64.19,79.11 v64.19,98.16
LED8
  Top 0.305: IC4.16 59.44,68.13 60,68.7 R21.2
LED9  (via drill 0.8)
  Top 0.305: IC5.2 101.39,28.3 v101.65,28.57 | v104.19,50.16 R26.2
  Bottom 0.305: v101.65,28.57 104.19,31.11 v104.19,50.16
LED10
  Top 0.305: IC5.16 99.44,20.13 100,20.7 R27.2
LED11  (via drill 0.8)
  Top 0.305: IC6.2 101.39,76.31 v101.65,76.57 | v104.19,98.16 R32.2
  Bottom 0.305: v101.65,76.57 104.19,79.11 v104.19,98.16
LED12
  Top 0.305: IC6.16 99.44,68.13 100,68.7 R33.2
LED13  (via drill 0.8)
  Top 0.305: IC7.2 141.38,28.3 v141.65,28.57 | v144.19,50.16 R38.2
  Bottom 0.305: v141.65,28.57 144.19,31.11 v144.19,50.16
LED14
  Top 0.305: IC7.16 139.44,20.13 140,20.7 R39.2
LED15  (via drill 0.8)
  Top 0.305: IC8.2 141.38,76.31 v141.65,76.57 | v144.19,98.16 R44.2
  Bottom 0.305: v141.65,76.57 144.19,79.11 v144.19,98.16
LED16
  Top 0.305: IC8.16 139.44,68.13 140,68.7 R45.2
N$1
  Top 0.305: R1.1 30.76,50.16 D1.A
N$2
  Top 0.305: R6.1 31.78,20.7 D2.A
N$3
  Top 0.305: 29.27,26.03 29.25,26.03 OUT.3
  Top 0.406: OUT.3 28.68,27.89 28.38,28.19 R4.1
N$4
  Top 0.305: R5.1 32.7,23.11 34.35,24.76 34.35,31.75 35.62,33.02 37.52,33.02 38.16,33.65 38.16,33.59 OUT.2
N$5
  Top 0.305: R2.2 29.27,47.62 31.81,45.08 38.16,45.08 38.16,45.02 IN.2
N$6
  Top 0.305: R8.1 30.76,98.16 D3.A
N$7
  Top 0.305: R9.1 31.78,68.7 D4.A
N$8
  Top 0.305: 29.27,74.03 29.25,74.03 OUT1.3
  Top 0.406: OUT1.3 28.68,75.89 28.38,76.19 R10.1
N$9
  Top 0.305: R11.1 32.7,71.11 34.35,72.76 34.35,79.75 35.62,81.02 37.52,81.02 38.16,81.65 38.16,81.58 OUT1.2
N$10
  Top 0.305: R12.2 29.27,95.62 31.81,93.08 38.16,93.08 38.16,93.02 IN1.2
N$11
  Top 0.305: R14.1 70.76,50.16 D5.A
N$12
  Top 0.305: R15.1 71.78,20.7 D6.A
N$13
  Top 0.305: 69.27,26.03 69.25,26.03 OUT2.3
  Top 0.406: OUT2.3 68.68,27.89 68.38,28.19 R16.1
N$14
  Top 0.305: R17.1 72.7,23.11 74.35,24.76 74.35,31.75 75.62,33.02 77.53,33.02 78.16,33.65 78.16,33.59 OUT2.2
N$15
  Top 0.305: R18.2 69.27,47.62 71.81,45.08 78.16,45.08 78.16,45.02 IN2.2
N$16
  Top 0.305: R20.1 70.76,98.16 D7.A
N$17
  Top 0.305: R21.1 71.78,68.7 D8.A
N$18
  Top 0.305: 69.27,74.03 69.25,74.03 OUT3.3
  Top 0.406: OUT3.3 68.68,75.89 68.38,76.19 R22.1
N$19
  Top 0.305: R23.1 72.7,71.11 74.35,72.76 74.35,79.75 75.62,81.02 77.53,81.02 78.16,81.65 78.16,81.58 OUT3.2
N$20
  Top 0.305: R24.2 69.27,95.62 71.81,93.08 78.16,93.08 78.16,93.02 IN3.2
N$21
  Top 0.305: R26.1 110.76,50.16 D9.A
N$22
  Top 0.305: R27.1 111.78,20.7 D10.A
N$23
  Top 0.305: 109.27,26.03 109.25,26.03 OUT4.3
  Top 0.406: OUT4.3 108.68,27.89 108.38,28.19 R28.1
N$24
  Top 0.305: R29.1 112.7,23.11 114.35,24.76 114.35,31.75 115.62,33.02 117.53,33.02 118.16,33.65 118.16,33.59 OUT4.2
N$25
  Top 0.305: R30.2 109.27,47.62 111.81,45.08 118.16,45.08 118.16,45.02 IN4.2
N$26
  Top 0.305: R32.1 110.76,98.16 D11.A
N$27
  Top 0.305: R33.1 111.78,68.7 D12.A
N$28
  Top 0.305: 109.27,74.03 109.25,74.03 OUT5.3
  Top 0.406: OUT5.3 108.68,75.89 108.38,76.19 R34.1
N$29
  Top 0.305: R35.1 112.7,71.11 114.35,72.76 114.35,79.75 115.62,81.02 117.53,81.02 118.16,81.65 118.16,81.58 OUT5.2
N$30
  Top 0.305: R36.2 109.27,95.62 111.81,93.08 118.16,93.08 118.16,93.02 IN5.2
N$31
  Top 0.305: R38.1 150.76,50.16 D13.A
N$32
  Top 0.305: R39.1 151.78,20.7 D14.A
N$33
  Top 0.305: 149.27,26.03 149.25,26.03 OUT6.3
  Top 0.406: OUT6.3 148.68,27.89 148.38,28.19 R40.1
N$34
  Top 0.305: R41.1 152.7,23.11 154.35,24.76 154.35,31.75 155.62,33.02 157.53,33.02 158.16,33.65 158.16,33.59 OUT6.2
N$35
  Top 0.305: R42.2 149.27,47.62 151.81,45.08 158.16,45.08 158.16,45.02 IN6.2
N$36
  Top 0.305: R44.1 150.76,98.16 D15.A
N$37
  Top 0.305: R45.1 151.78,68.7 D16.A
N$38
  Top 0.305: 149.27,74.03 149.25,74.03 OUT7.3
  Top 0.406: OUT7.3 148.68,75.89 148.38,76.19 R46.1
N$39
  Top 0.305: R47.1 152.7,71.11 154.35,72.76 154.35,79.75 155.62,81.02 157.53,81.02 158.16,81.65 158.16,81.58 OUT7.2
N$40
  Top 0.305: R48.2 149.27,95.62 151.81,93.08 158.16,93.08 158.16,93.02 IN7.2
PGC
  Top 0.305: ICSP.5 21.65,15.11 20.73,16.02 IC1.18
PGC1
  Top 0.305: ICSP1.5 21.65,63.11 20.73,64.02 IC2.18
PGC2
  Top 0.305: ICSP2.5 61.65,15.11 60.73,16.02 IC3.18
PGC3
  Top 0.305: ICSP3.5 61.65,63.11 60.73,64.02 IC4.18
PGC4
  Top 0.305: ICSP4.5 101.65,15.11 100.73,16.02 IC5.18
PGC5
  Top 0.305: ICSP5.5 101.65,63.11 100.73,64.02 IC6.18
PGC6
  Top 0.305: ICSP6.5 141.65,15.11 140.74,16.02 IC7.18
PGC7
  Top 0.305: ICSP7.5 141.65,63.11 140.74,64.02 IC8.18
PGD  (via drill 0.8)
  Top 0.305: IC1.19 21.39,16.77 21.78,16.38 v22.92,16.38 | v30.67,16.38 ICSP.4
  Bottom 0.305: v22.92,16.38 v30.67,16.38
PGD1  (via drill 0.8)
  Top 0.305: IC2.19 21.39,64.77 21.78,64.38 v22.92,64.38 | v30.67,64.38 ICSP1.4
  Bottom 0.305: v22.92,64.38 v30.67,64.38
PGD2  (via drill 0.8)
  Top 0.305: IC3.19 61.38,16.77 61.78,16.38 v62.92,16.38 | v70.67,16.38 ICSP2.4
  Bottom 0.305: v62.92,16.38 v70.67,16.38
PGD3  (via drill 0.8)
  Top 0.305: IC4.19 61.38,64.77 61.78,64.38 v62.92,64.38 | v70.67,64.38 ICSP3.4
  Bottom 0.305: v62.92,64.38 v70.67,64.38
PGD4  (via drill 0.8)
  Top 0.305: IC5.19 101.39,16.77 101.78,16.38 v102.92,16.38 | v110.67,16.38 ICSP4.4
  Bottom 0.305: v102.92,16.38 v110.67,16.38
PGD5  (via drill 0.8)
  Top 0.305: IC6.19 101.39,64.77 101.78,64.38 v102.92,64.38 | v110.67,64.38 ICSP5.4
  Bottom 0.305: v102.92,64.38 v110.67,64.38
PGD6  (via drill 0.8)
  Top 0.305: IC7.19 141.38,16.77 141.78,16.38 v142.92,16.38 | v150.67,16.38 ICSP6.4
  Bottom 0.305: v142.92,16.38 v150.67,16.38
PGD7  (via drill 0.8)
  Top 0.305: IC8.19 141.38,64.77 141.78,64.38 v142.92,64.38 | v150.67,64.38 ICSP7.4
  Bottom 0.305: v142.92,64.38 v150.67,64.38
RX
  Top 0.305: IC1.5 19.43,27.48 16.44,30.48 16.44,39.87 17.84,41.27 R3.1 24.57,41.34 24.57,42.92 25.78,44.13 R2.1
RX1
  Top 0.305: IC2.5 19.43,75.48 16.44,78.47 16.44,87.87 17.84,89.27 R7.1 24.57,89.34 24.57,90.92 25.78,92.13 R12.1
RX2
  Top 0.305: IC3.5 59.44,27.48 56.44,30.48 56.44,39.87 57.84,41.27 R13.1 64.57,41.34 64.57,42.92 65.78,44.13 R18.1
RX3
  Top 0.305: IC4.5 59.44,75.48 56.44,78.47 56.44,87.87 57.84,89.27 R19.1 64.57,89.34 64.57,90.92 65.78,92.13 R24.1
RX4
  Top 0.305: IC5.5 99.44,27.48 96.44,30.48 96.44,39.87 97.84,41.27 R25.1 104.57,41.34 104.57,42.92 105.78,44.13 R30.1
RX5
  Top 0.305: IC6.5 99.44,75.48 96.44,78.47 96.44,87.87 97.84,89.27 R31.1 104.57,89.34 104.57,90.92 105.78,92.13 R36.1
RX6
  Top 0.305: IC7.5 139.44,27.48 136.44,30.48 136.44,39.87 137.84,41.27 R37.1 144.57,41.34 144.57,42.92 145.78,44.13 R42.1
RX7
  Top 0.305: IC8.5 139.44,75.48 136.44,78.47 136.44,87.87 137.84,89.27 R43.1 144.57,89.34 144.57,90.92 145.78,92.13 R48.1
TX
  Top 0.305: IC1.6 18.79,22.55 19.11,22.22 21.52,22.22 22.41,23.11 R5.2
TX1
  Top 0.305: IC2.6 18.79,70.55 19.11,70.22 21.52,70.22 22.41,71.11 R11.2
TX2
  Top 0.305: IC3.6 58.78,22.55 59.11,22.22 61.52,22.22 62.41,23.11 R17.2
TX3
  Top 0.305: IC4.6 58.78,70.55 59.11,70.22 61.52,70.22 62.41,71.11 R23.2
TX4
  Top 0.305: IC5.6 98.78,22.55 99.11,22.22 101.52,22.22 102.41,23.11 R29.2
TX5
  Top 0.305: IC6.6 98.78,70.55 99.11,70.22 101.52,70.22 102.41,71.11 R35.2
TX6
  Top 0.305: IC7.6 138.78,22.55 139.11,22.22 141.52,22.22 142.41,23.11 R41.2
TX7
  Top 0.305: IC8.6 138.78,70.55 139.11,70.22 141.52,70.22 142.41,71.11 R47.2
VPP  (via drill 0.8)
  Top 0.305: ICSP.1 v26.73,17.65 | IC1.4 20.09,23.79 v20.13,23.74
  Bottom 0.305: v26.73,17.65 24.7,17.65 20.13,22.22 v20.13,23.74
VPP1  (via drill 0.8)
  Top 0.305: ICSP1.1 v26.73,65.65 | IC2.4 20.09,71.78 v20.13,71.74
  Bottom 0.305: v26.73,65.65 24.7,65.65 20.13,70.22 v20.13,71.74
VPP2  (via drill 0.8)
  Top 0.305: ICSP2.1 v66.73,17.65 | IC3.4 60.09,23.79 v60.13,23.74
  Bottom 0.305: v66.73,17.65 64.7,17.65 60.13,22.22 v60.13,23.74
VPP3  (via drill 0.8)
  Top 0.305: ICSP3.1 v66.73,65.65 | IC4.4 60.09,71.78 v60.13,71.74
  Bottom 0.305: v66.73,65.65 64.7,65.65 60.13,70.22 v60.13,71.74
VPP4  (via drill 0.8)
  Top 0.305: ICSP4.1 v106.73,17.65 | IC5.4 100.08,23.79 v100.13,23.74
  Bottom 0.305: v106.73,17.65 104.7,17.65 100.13,22.22 v100.13,23.74
VPP5  (via drill 0.8)
  Top 0.305: ICSP5.1 v106.73,65.65 | IC6.4 100.08,71.78 v100.13,71.74
  Bottom 0.305: v106.73,65.65 104.7,65.65 100.13,70.22 v100.13,71.74
VPP6  (via drill 0.8)
  Top 0.305: ICSP6.1 v146.73,17.65 | IC7.4 140.09,23.79 v140.13,23.74
  Bottom 0.305: v146.73,17.65 144.7,17.65 140.13,22.22 v140.13,23.74
VPP7  (via drill 0.8)
  Top 0.305: ICSP7.1 v146.73,65.65 | IC8.4 140.09,71.78 v140.13,71.74
  Bottom 0.305: v146.73,65.65 144.7,65.65 140.13,70.22 v140.13,71.74

## Text on the board
tPlace: hotchk155/2023 | hotchk155/2023 | hotchk155/2023 | hotchk155/2023 | MIDI NUBBIN V3.1 | MIDI NUBBIN V3.1 | MIDI NUBBIN V3.1 | MIDI NUBBIN V3.1 | hotchk155/2023 | hotchk155/2023 | hotchk155/2023 | hotchk155/2023 | MIDI NUBBIN V3.1 | MIDI NUBBIN V3.1 | MIDI NUBBIN V3.1 | MIDI NUBBIN V3.1
_tNames: R1 | R1 | R1 | R1 | D1 | D1 | D1 | D1 | R2 | R2 | R2 | R2 | IN | IN | IN | IN | R3 | R3 | R3 | R3 | C1 | C1 | C1 | C1 | R4 | R4 | R4 | R4 | C2 | C2 | C2 | C2 | OUT | OUT | OUT | OUT | R5 | R5 | R5 | R5 | D2 | D2 | D2 | D2 | R6 | R6 | R6 | R6 | IC1 | IC1 | IC1 | IC1 | ICSP | ICSP | ICSP | ICSP | R1 | R1 | R1 | R1 | D1 | D1 | D1 | D1 | R2 | R2 | R2 | R2 | IN | IN | IN | IN | R3 | R3 | R3 | R3 | C1 | C1 | C1 | C1 | R4 | R4 | R4 | R4 | C2 | C2 | C2 | C2 | OUT | OUT | OUT | OUT | R5 | R5 | R5 | R5 | D2 | D2 | D2 | D2 | R6 | R6 | R6 | R6 | IC1 | IC1 | IC1 | IC1 | ICSP | ICSP | ICSP | ICSP